# EAGLE board LiPo-Charger-Basic-v10--Reworked (EAGLE 6.4)
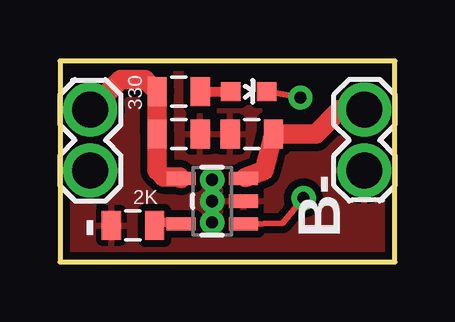
[diagram p0: board, top side]
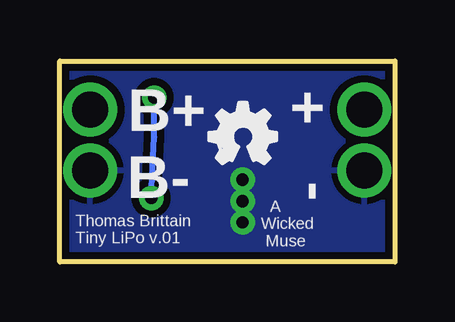
[diagram p1: board, bottom side, seen from below]

Size 13.97 x 8.38 mm. Coordinates in mm from the lower left corner, seen from the top.
Outline: 13.97,0 13.97,8.38 0,8.38 0,0 13.97,0
Copper layers (1*16): Top 0.035mm / dielectric 1.5mm / Bottom 0.035mm
Design rules "SparkFun": minimum track width 8mil, minimum drill 20mil, track to track 8mil, track to pad 8mil, pad to pad 8mil, via to via 8mil, smd to smd 6mil, copper to edge 8mil, drill to drill 8mil, minimum pad ring 12mil, minimum via ring 10mil, stop-mask expansion 4mil, vias tented up to drill 25mil, thermal gap 10mil

## Footprints (pad centres in the part's own frame; a part is rotated, then mirrored left to right if it is on the bottom)
0805 = smd 0.8 x 1.2: 1 -0.9,0; 2 0.9,0
LED-0603 = smd 0.8 x 0.8: A 0,-0.75; C 0,0.75
SOT23-5 = smd 0.55 x 1.2: 1 -0.95,-1.3; 2 0,-1.3; 3 0.95,-1.3; 4 0.95,1.3; 5 -0.95,1.3
1X2_SHORT_ROUND = drill 1.5 pad 2.2: 1 1.27,-1.27; 2 3.81,-1.27

## Placement (x,y rotation side)
C3  4.7uF  [0805]  4.95,5.33 0 top
C4  4.7uF  [0805]  8,5.33 180 top
D11  RED  [LED-0603]  7.87,7.11 270 top
R3  330  [0805]  4.95,7.11 180 top
R4  2K  [0805]  3.05,1.52 180 top
U1  MCP73831  [SOT23-5]  6.35,2.54 90 top
U$1  1X2_SHORT_ROUND  [1X2_SHORT_ROUND]  0,2.54 90 top
U$3  [OSHW_FILLX100_NOTEXT]  7.75,4.1 0 bottom
U$4  1X2_SHORT_ROUND  [1X2_SHORT_ROUND]  13.97,7.62 270 top

## Library data of the parts
C3 C4 D11 R3 R4 U1 = SparkFun
U$1 U$4 = Random parts
U$3 = ohw-logo

## Nets
GND: C3.2 C4.2 R4.2 U1.2 U$1.1 U$4.2
N$3: D11.A R3.1
PROG: R4.1 U1.5
STAT: D11.C U1.1
VCC: C4.1 U1.3 U$4.1
VIN: C3.1 R3.2 U1.4 U$1.2

## Tracks (layer width: path | path; a pad name or v marks a point on that pad's centre or on a via)
GND  (via drill 0.51)
  other vias: 6.35,2.54 6.35,3.43 6.35,1.65
  pour Bottom (isolate 0.305): 0,0 0.13,8.38 14.48,8.38 14.35,0
  pour Top (isolate 0.305): 0.13,8.38 14.48,8.38 14.35,0 0,0
N$3
  Top 0.406: R3.1 D11.A
PROG
  Top 0.406: U1.5 4.29,1.67 R4.1
STAT  (via drill 0.51)
  Top 0.254: v10.03,6.86 D11.C | U1.1 9.3,1.62 v10.16,2.67
  Bottom 0.254: v10.03,6.86 10.03,5.21 v10.16,2.67
VCC
  Top 0.406: U1.3 7.75,3.52
  Top 0.813: 7.75,3.52 8.51,3.81 8.65,4.33 C4.1 10.67,5.33 11.68,6.35 U$4.1
VIN
  Top 0.813: U$1.2 2.54,7.62 3.54,7.62 R3.2 C3.1 4.05,3.82 4.32,3.56 4.98,3.56 U1.4

## Text on the board
tPlace: - | B-
bPlace: B+ | + | - | B-
_tsilk: 330 | 2K
_bsilk: A / Wicked / Muse | Thomas Brittain / Tiny LiPo v.01